# EAGLE board VgaCrystalDiode_SOLVED-production (EAGLE 5.10)
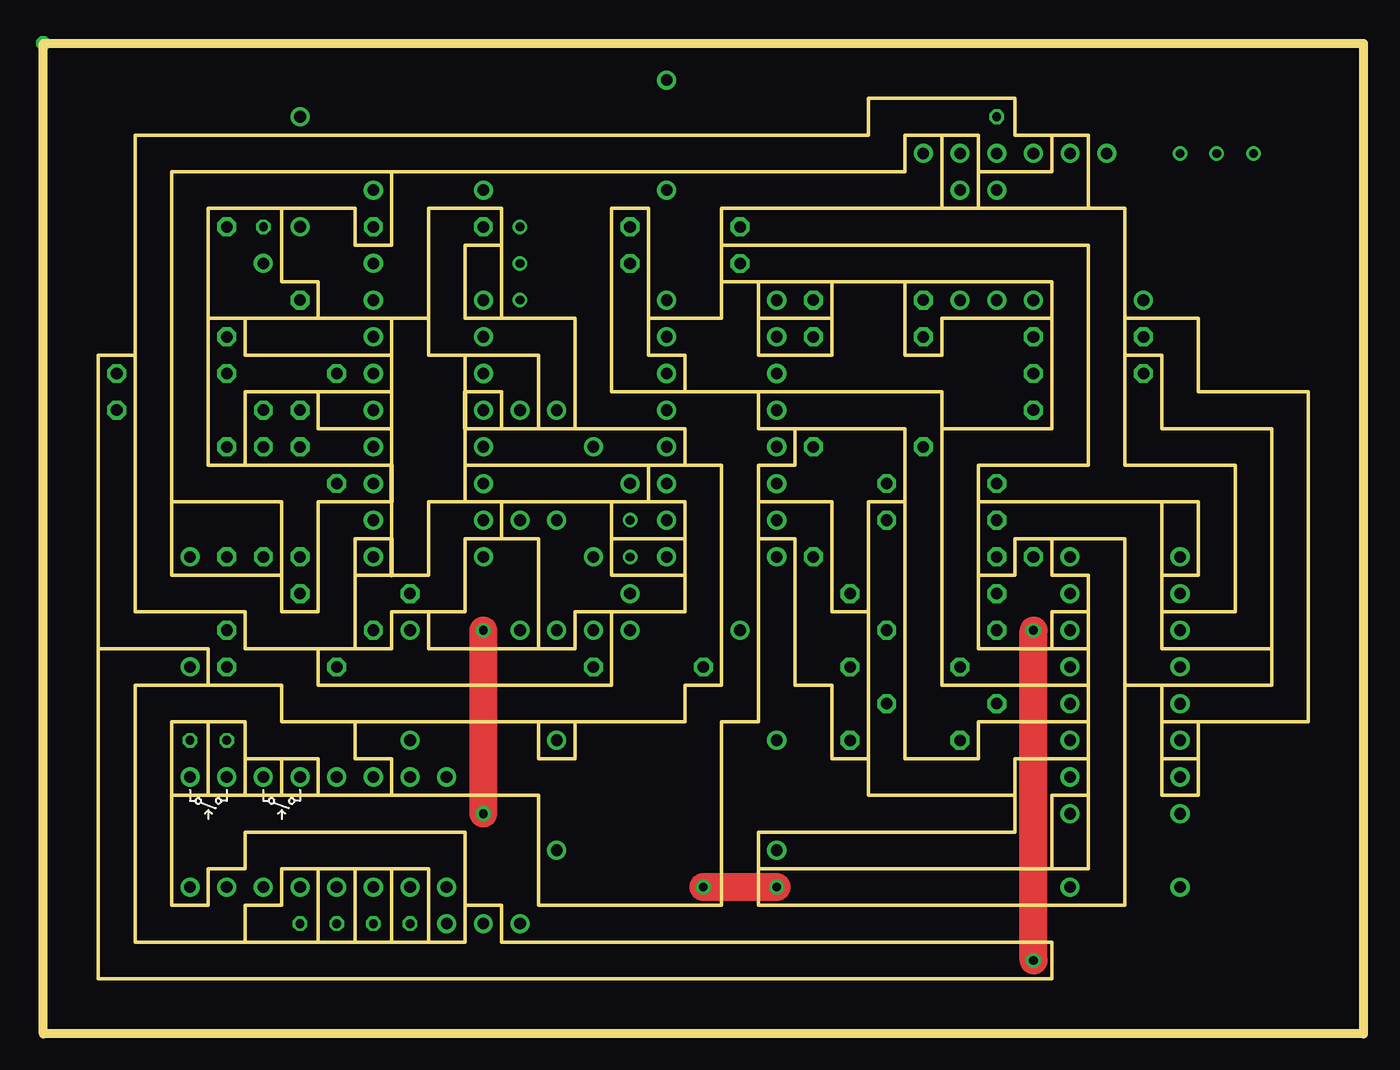
[diagram p0: board, top side]
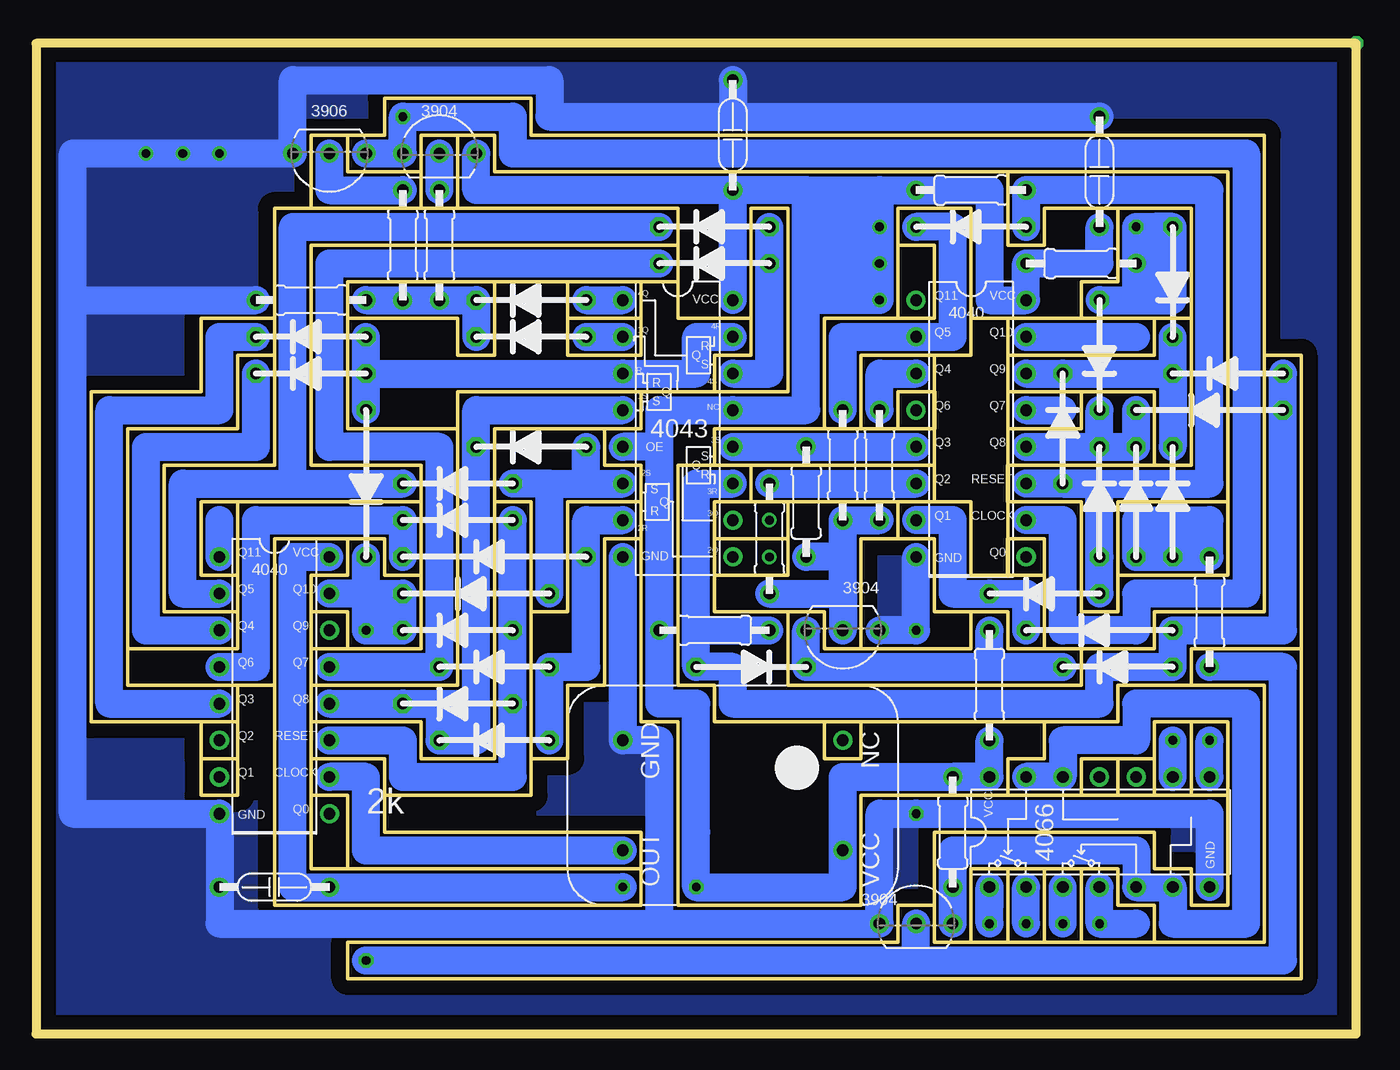
[diagram p1: board, bottom side, seen from below]

Size 91.44 x 68.58 mm. Coordinates in mm from the lower left corner, seen from the top.
Outline: 49.53,36.83 54.61,36.83 54.61,29.21 57.15,29.21
Outline: 49.53,36.83 49.53,39.37 52.07,39.37 52.07,41.91
Outline: 52.07,41.91 49.53,41.91 49.53,44.45
Outline: 49.53,44.45 44.45,44.45
Outline: 44.45,44.45 39.37,44.45 39.37,57.15 41.91,57.15 41.91,49.53
Outline: 41.91,49.53 41.91,46.99 44.45,46.99 44.45,44.45
Outline: 41.91,49.53 46.99,49.53 46.99,52.07
Outline: 46.99,52.07 46.99,54.61
Outline: 46.99,54.61 46.99,57.15 62.23,57.15
Outline: 62.23,57.15 62.23,62.23
Outline: 62.23,62.23 59.69,62.23 59.69,59.69 24.13,59.69
Outline: 24.13,59.69 24.13,54.61 21.59,54.61 21.59,57.15 16.51,57.15
Outline: 16.51,57.15 16.51,52.07 19.05,52.07 19.05,49.53
Outline: 19.05,49.53 24.13,49.53
Outline: 24.13,49.53 26.67,49.53
Outline: 26.67,49.53 26.67,57.15 31.75,57.15 31.75,54.61
Outline: 31.75,54.61 31.75,49.53
Outline: 31.75,49.53 36.83,49.53 36.83,41.91
Outline: 36.83,41.91 44.45,41.91 44.45,39.37
Outline: 44.45,39.37 46.99,39.37 46.99,24.13 44.45,24.13 44.45,21.59 36.83,21.59
Outline: 36.83,21.59 36.83,19.05 34.29,19.05 34.29,21.59
Outline: 34.29,21.59 21.59,21.59
Outline: 21.59,21.59 21.59,19.05 24.13,19.05 24.13,16.51
Outline: 24.13,16.51 34.29,16.51 34.29,8.89 46.99,8.89 46.99,21.59 49.53,21.59 49.53,34.29
Outline: 49.53,34.29 49.53,36.83
Outline: 31.75,34.29 34.29,34.29 34.29,26.67
Outline: 31.75,34.29 29.21,34.29 29.21,29.21 26.67,29.21
Outline: 26.67,29.21 26.67,26.67 34.29,26.67
Outline: 44.45,34.29 44.45,36.83 41.91,36.83
Outline: 44.45,34.29 39.37,34.29
Outline: 39.37,34.29 39.37,36.83
Outline: 39.37,36.83 41.91,36.83
Outline: 44.45,34.29 44.45,31.75
Outline: 44.45,31.75 39.37,31.75 39.37,34.29
Outline: 39.37,36.83 31.75,36.83
Outline: 31.75,36.83 31.75,34.29
Outline: 44.45,31.75 44.45,29.21 39.37,29.21
Outline: 39.37,29.21 39.37,24.13 19.05,24.13 19.05,26.67
Outline: 19.05,26.67 13.97,26.67 13.97,29.21 6.35,29.21 6.35,46.99
Outline: 6.35,46.99 3.81,46.99 3.81,26.67
Outline: 3.81,26.67 11.43,26.67 11.43,24.13
Outline: 11.43,24.13 16.51,24.13 16.51,21.59 21.59,21.59
Outline: 24.13,16.51 19.05,16.51
Outline: 19.05,16.51 19.05,19.05 16.51,19.05
Outline: 16.51,19.05 13.97,19.05
Outline: 13.97,19.05 13.97,21.59 11.43,21.59
Outline: 11.43,21.59 8.89,21.59 8.89,16.51
Outline: 8.89,16.51 8.89,8.89 11.43,8.89 11.43,11.43 13.97,11.43 13.97,13.97 29.21,13.97 29.21,8.89
Outline: 29.21,8.89 29.21,6.35 26.67,6.35
Outline: 26.67,6.35 26.67,11.43 24.13,11.43
Outline: 24.13,11.43 21.59,11.43
Outline: 21.59,11.43 19.05,11.43
Outline: 19.05,11.43 16.51,11.43 16.51,8.89 13.97,8.89 13.97,6.35
Outline: 13.97,6.35 6.35,6.35 6.35,24.13 11.43,24.13
Outline: 3.81,26.67 3.81,3.81 69.85,3.81 69.85,6.35 31.75,6.35 31.75,8.89 29.21,8.89
Outline: 26.67,6.35 24.13,6.35
Outline: 24.13,6.35 24.13,11.43
Outline: 24.13,6.35 21.59,6.35
Outline: 21.59,6.35 21.59,11.43
Outline: 21.59,6.35 19.05,6.35
Outline: 19.05,6.35 19.05,11.43
Outline: 19.05,6.35 13.97,6.35
Outline: 13.97,19.05 13.97,16.51
Outline: 13.97,16.51 11.43,16.51
Outline: 11.43,16.51 8.89,16.51
Outline: 11.43,16.51 11.43,21.59
Outline: 13.97,16.51 16.51,16.51
Outline: 16.51,16.51 19.05,16.51
Outline: 16.51,16.51 16.51,19.05
Outline: 26.67,29.21 24.13,29.21 24.13,26.67 21.59,26.67
Outline: 21.59,26.67 19.05,26.67
Outline: 21.59,26.67 21.59,31.75
Outline: 21.59,31.75 21.59,34.29 24.13,34.29
Outline: 24.13,34.29 24.13,36.83
Outline: 24.13,36.83 19.05,36.83 19.05,29.21 16.51,29.21 16.51,31.75
Outline: 16.51,31.75 8.89,31.75 8.89,36.83
Outline: 8.89,36.83 8.89,59.69 24.13,59.69
Outline: 6.35,46.99 6.35,62.23 57.15,62.23 57.15,64.77 67.31,64.77 67.31,62.23 69.85,62.23
Outline: 69.85,62.23 69.85,59.69 64.77,59.69
Outline: 64.77,59.69 64.77,62.23 62.23,62.23
Outline: 62.23,57.15 64.77,57.15
Outline: 64.77,57.15 64.77,59.69
Outline: 64.77,57.15 72.39,57.15
Outline: 72.39,57.15 72.39,62.23 69.85,62.23
Outline: 49.53,49.53 49.53,46.99 54.61,46.99 54.61,49.53
Outline: 49.53,49.53 54.61,49.53
Outline: 54.61,49.53 54.61,52.07 49.53,52.07 49.53,49.53
Outline: 46.99,52.07 59.69,52.07
Outline: 59.69,52.07 69.85,52.07 69.85,49.53
Outline: 69.85,49.53 69.85,41.91 62.23,41.91
Outline: 62.23,41.91 62.23,24.13 72.39,24.13
Outline: 72.39,24.13 72.39,26.67
Outline: 72.39,26.67 69.85,26.67
Outline: 69.85,26.67 64.77,26.67 64.77,31.75
Outline: 64.77,31.75 64.77,36.83
Outline: 64.77,36.83 64.77,39.37 72.39,39.37 72.39,54.61 46.99,54.61
Outline: 72.39,57.15 74.93,57.15 74.93,49.53
Outline: 74.93,49.53 74.93,46.99
Outline: 74.93,46.99 74.93,39.37 82.55,39.37 82.55,29.21 77.47,29.21
Outline: 77.47,29.21 77.47,31.75
Outline: 77.47,31.75 80.01,31.75 80.01,36.83 77.47,36.83
Outline: 77.47,36.83 64.77,36.83
Outline: 64.77,31.75 67.31,31.75 67.31,34.29 69.85,34.29
Outline: 69.85,34.29 74.93,34.29 74.93,24.13
Outline: 74.93,24.13 77.47,24.13
Outline: 77.47,24.13 85.09,24.13 85.09,26.67
Outline: 85.09,26.67 85.09,41.91 77.47,41.91 77.47,46.99 74.93,46.99
Outline: 77.47,24.13 77.47,21.59
Outline: 77.47,21.59 80.01,21.59
Outline: 80.01,21.59 87.63,21.59 87.63,44.45 80.01,44.45 80.01,49.53 74.93,49.53
Outline: 69.85,49.53 62.23,49.53 62.23,46.99 59.69,46.99 59.69,52.07
Outline: 49.53,44.45 62.23,44.45 62.23,41.91
Outline: 52.07,41.91 59.69,41.91 59.69,36.83
Outline: 59.69,36.83 57.15,36.83 57.15,29.21
Outline: 57.15,19.05 54.61,19.05 54.61,24.13 52.07,24.13 52.07,34.29 49.53,34.29
Outline: 57.15,19.05 57.15,29.21
Outline: 59.69,36.83 59.69,19.05 64.77,19.05 64.77,21.59 72.39,21.59
Outline: 72.39,21.59 72.39,24.13
Outline: 72.39,21.59 72.39,19.05
Outline: 72.39,19.05 67.31,19.05 67.31,16.51
Outline: 67.31,16.51 57.15,16.51 57.15,19.05
Outline: 49.53,11.43 49.53,13.97 67.31,13.97 67.31,16.51
Outline: 72.39,19.05 72.39,16.51
Outline: 72.39,16.51 69.85,16.51 69.85,11.43
Outline: 69.85,11.43 49.53,11.43
Outline: 49.53,11.43 49.53,8.89 74.93,8.89 74.93,24.13
Outline: 69.85,11.43 72.39,11.43 72.39,16.51
Outline: 77.47,21.59 77.47,19.05
Outline: 77.47,19.05 80.01,19.05
Outline: 80.01,19.05 80.01,21.59
Outline: 80.01,19.05 80.01,16.51 77.47,16.51 77.47,19.05
Outline: 77.47,29.21 77.47,26.67 85.09,26.67
Outline: 77.47,31.75 77.47,36.83
Outline: 34.29,26.67 36.83,26.67 36.83,29.21 39.37,29.21
Outline: 19.05,49.53 13.97,49.53
Outline: 13.97,49.53 11.43,49.53
Outline: 11.43,49.53 11.43,57.15 16.51,57.15
Outline: 11.43,49.53 11.43,39.37 13.97,39.37
Outline: 13.97,39.37 13.97,44.45 19.05,44.45
Outline: 19.05,44.45 24.13,44.45
Outline: 24.13,44.45 24.13,46.99
Outline: 24.13,46.99 13.97,46.99 13.97,49.53
Outline: 24.13,46.99 24.13,49.53
Outline: 24.13,44.45 24.13,41.91
Outline: 24.13,41.91 19.05,41.91 19.05,44.45
Outline: 13.97,39.37 24.13,39.37
Outline: 24.13,39.37 24.13,41.91
Outline: 31.75,54.61 29.21,54.61 29.21,49.53 31.75,49.53
Outline: 36.83,41.91 34.29,41.91
Outline: 34.29,41.91 34.29,46.99 29.21,46.99
Outline: 29.21,46.99 26.67,46.99 26.67,49.53
Outline: 34.29,41.91 31.75,41.91
Outline: 31.75,41.91 31.75,44.45 29.21,44.45
Outline: 29.21,44.45 29.21,46.99
Outline: 44.45,39.37 41.91,39.37
Outline: 41.91,39.37 29.21,39.37
Outline: 29.21,39.37 29.21,41.91
Outline: 29.21,41.91 31.75,41.91
Outline: 29.21,39.37 29.21,36.83
Outline: 29.21,36.83 31.75,36.83
Outline: 41.91,36.83 41.91,39.37
Outline: 21.59,31.75 24.13,31.75
Outline: 24.13,31.75 26.67,31.75 26.67,36.83 29.21,36.83
Outline: 8.89,36.83 16.51,36.83 16.51,31.75
Outline: 72.39,26.67 72.39,29.21
Outline: 72.39,29.21 72.39,31.75 69.85,31.75 69.85,34.29
Outline: 69.85,26.67 69.85,29.21 72.39,29.21
Outline: 34.29,21.59 36.83,21.59
Outline: 24.13,36.83 24.13,39.37
Outline: 24.13,34.29 24.13,31.75
Outline: 29.21,41.91 29.21,44.45
Outline: 0,0 0,68.58 91.44,68.58 91.44,0 0,0
Copper layers (1*16): Top 0.035mm / dielectric 1.5mm / Bottom 0.035mm
Design rules "default": minimum track width 10mil, minimum drill 24mil, track to track 8mil, track to pad 8mil, pad to pad 8mil, via to via 8mil, smd to smd 8mil, copper to edge 40mil, drill to drill 8mil, minimum pad ring 10mil, minimum via ring 8mil, stop-mask expansion 4mil, vias tented up to drill 0mil, thermal gap 10mil

## Footprints (pad centres in the part's own frame; a part is rotated, then mirrored left to right if it is on the bottom)
4043-SR-LATCH = drill 0.813 round: 1!R -3.81,1.27; 1!S -3.81,3.81; 1Q 3.81,1.27; 2!R -3.81,-3.81; 2!S -3.81,-6.35; 2Q 3.81,-8.89; 3!R 3.81,-1.27; 3!S 3.81,-3.81; 3Q 3.81,-6.35; 4!R 3.81,3.81; 4!S 3.81,6.35; 4Q -3.81,8.89; GND -3.81,-8.89; NC -3.81,6.35; OE -3.81,-1.27; VCC 3.81,8.89
DIODE = drill 0.8 octagon: P$1 -3.81,0; P$2 3.81,0
DIODE-L2 = drill 0.8 octagon: P$1 -5.08,0; P$2 5.08,0
404-BIN-COUNT = drill 0.813 round: CLOCK 3.81,-7.62; GND -3.81,-10.16; Q0 3.81,-10.16; Q1 -3.81,-7.62; Q2 -3.81,-5.08; Q3 -3.81,-2.54; Q4 -3.81,2.54; Q5 -3.81,5.08; Q6 -3.81,0; Q7 3.81,0; Q8 3.81,-2.54; Q9 3.81,2.54; Q10 3.81,5.08; Q11 -3.81,7.62; RESET 3.81,-5.08; VCC 3.81,7.62
711A-XTAL = drill 0.813 round: GND -3.81,-8.89; NC -3.81,6.35; OUT 3.81,-8.89; VCC 3.81,6.35
4066-QUAD-SW = drill 0.813 round: A1 -3.81,7.62; A2 -3.81,2.54; A3 3.81,-5.08; A4 3.81,0; B1 -3.81,5.08; B2 -3.81,0; B3 3.81,-7.62; B4 3.81,-2.54; C1 3.81,5.08; C2 -3.81,-2.54; C3 -3.81,-5.08; C4 3.81,2.54; GND -3.81,-7.62; VCC 3.81,7.62
RESISTOR = drill 0.813 round: IN1 -3.81,0; IN2 3.81,0
TRANSISTOR = drill 0.8 round: P$1 0,0; P$2 2.54,0; P$3 -2.54,0
CAPACITOR = drill 0.813 round: IN1 -2.54,0; IN2 5.08,0
DIODE-L3 = drill 0.8 octagon: P$1 -6.35,0; P$2 6.35,0

## Placement (x,y rotation side)
E$1  [4043-SR-LATCH]  46.99,41.91 0 bottom
E$2  [DIODE]  44.45,53.34 180 bottom
E$3  [DIODE]  62.23,22.86 180 bottom
E$4  [DIODE-L2]  10.16,43.18 180 bottom
E$5  [404-BIN-COUNT]  74.93,25.4 0 bottom
E$6  [711A-XTAL]  41.91,16.51 270 bottom
E$7  [4066-QUAD-SW]  17.78,13.97 90 bottom
E$8  [DIODE]  12.7,36.83 90 bottom
E$9  [DIODE]  62.23,27.94 180 bottom
E$10  2K  [RESISTOR]  10.16,29.21 270 bottom
E$11  [DIODE]  62.23,35.56 180 bottom
E$12  [DIODE]  59.69,20.32 180 bottom
E$13  [DIODE]  59.69,25.4 180 bottom
E$14  [DIODE]  57.15,48.26 180 bottom
E$15  [DIODE]  44.45,55.88 180 bottom
E$16  [TRANSISTOR]  30.48,7.62 0 bottom
E$17  [DIODE-L2]  68.58,38.1 270 bottom
E$18  [DIODE]  62.23,38.1 180 bottom
E$19  [DIODE]  57.15,40.64 180 bottom
E$20  2K  [RESISTOR]  26.67,58.42 0 bottom
E$21  [DIODE-L2]  60.96,30.48 180 bottom
E$22  [DIODE]  57.15,50.8 180 bottom
E$23  10K  [RESISTOR]  44.45,27.94 0 bottom
E$24  1UF  [CAPACITOR]  43.18,60.96 90 bottom
E$25  [DIODE]  72.39,45.72 180 bottom
E$26  [DIODE]  72.39,48.26 180 bottom
E$27  [404-BIN-COUNT]  26.67,43.18 0 bottom
E$28  [DIODE]  17.78,36.83 90 bottom
E$29  [DIODE]  20.32,41.91 90 bottom
E$30  [DIODE]  21.59,30.48 180 bottom
E$31  [DIODE]  26.67,55.88 180 bottom
E$33  [DIODE]  17.78,46.99 270 bottom
E$34  [DIODE]  12.7,52.07 270 bottom
E$35  2K  [RESISTOR]  66.04,54.61 90 bottom
E$36  2K  [RESISTOR]  63.5,54.61 90 bottom
E$37  [DIODE-L3]  59.69,33.02 180 bottom
E$38  [TRANSISTOR]  71.12,60.96 180 bottom
E$39  10K  [RESISTOR]  72.39,50.8 180 bottom
E$40  [DIODE]  15.24,36.83 90 bottom
E$41  2K  [RESISTOR]  19.05,53.34 180 bottom
E$42  2K  [RESISTOR]  27.94,13.97 270 bottom
E$43  2K  [RESISTOR]  25.4,24.13 270 bottom
E$44  1UF  [CAPACITOR]  17.78,58.42 90 bottom
E$45  1UF  [CAPACITOR]  76.2,10.16 0 bottom
E$46  [DIODE]  16.51,25.4 180 bottom
E$47  [DIODE]  8.89,45.72 180 bottom
E$48  [TRANSISTOR]  63.5,60.96 0 bottom
E$50  [DIODE-L2]  17.78,27.94 180 bottom
E$51  [TRANSISTOR]  35.56,27.94 180 bottom
E$52  2K  [RESISTOR]  33.02,39.37 270 bottom
E$54  2K  [RESISTOR]  35.56,39.37 270 bottom
E$56  [DIODE]  41.91,25.4 0 bottom
E$57  2K  [RESISTOR]  38.1,36.83 270 bottom
E$58  2K  [RESISTOR]  40.64,34.29 270 bottom

## Library data of the parts
E$1-E$31 E$33-E$48 E$50-E$52 E$54 E$56-E$58 = RussellLibrary

## Nets
GND: E$1.GND E$5.GND E$6.GND E$7.GND E$16.P$3 E$24.IN2 E$27.GND E$39.IN2 E$44.IN2 E$51.P$3
S$1: E$5.CLOCK E$6.OUT
S$2: E$5.Q11
S$3: E$3.P$1 E$5.RESET E$11.P$1
S$4: E$1.1!R E$3.P$2 E$5.Q8 E$12.P$2
S$5: E$8.P$1 E$10.IN1 E$40.P$1
S$6: E$5.Q5 E$15.P$2 E$18.P$2
S$7: E$1.1Q E$1.OE E$5.VCC E$6.VCC E$7.VCC E$27.VCC E$41.IN2 E$43.IN2 E$44.IN1
S$8: E$1.2!S E$12.P$1 E$13.P$1
S$9: E$1.2!R E$18.P$1 E$19.P$1
S$10: E$5.Q4 E$25.P$2
S$11: E$1.1!S E$1.4!S E$26.P$1
S$12: E$1.4!R E$2.P$1 E$15.P$1
S$13: E$2.P$2 E$5.Q7 E$13.P$2
S$14: E$1.4Q E$22.P$1
S$15: E$1.NC E$14.P$1
S$16: E$27.CLOCK
S$17: E$5.Q3 E$26.P$2
S$18: E$1.3!S E$23.IN2
S$19: E$27.Q4 E$52.IN1
S$20: E$8.P$2 E$27.Q9 E$29.P$2 E$34.P$2
S$21: E$27.Q8 E$28.P$2 E$33.P$2 E$40.P$2
S$22: E$1.3!R
S$23: E$20.IN2 E$27.RESET E$28.P$1 E$29.P$1 E$30.P$1 E$31.P$1
S$24: E$35.IN2
S$26: E$14.P$2 E$22.P$2 E$35.IN1 E$36.IN1 E$39.IN1
S$27: E$36.IN2
S$28: E$27.Q2 E$58.IN1
S$29: E$27.Q1 E$30.P$2 E$50.P$2
S$30: E$27.Q5 E$31.P$2 E$54.IN1
S$31: E$27.Q10
S$32: E$5.Q10 E$10.IN2 E$16.P$1 E$21.P$2
S$33: E$7.C1 E$7.C2 E$7.C3 E$7.C4 E$16.P$2
S$34: E$27.Q7
S$35: E$33.P$1 E$34.P$1 E$41.IN1
S$36: E$1.VCC
S$37: E$43.IN1 E$46.P$2 E$51.P$2
S$38: E$51.P$1 E$52.IN2 E$54.IN2 E$57.IN2 E$58.IN2
S$40: E$7.A1
S$43: E$7.A3
S$44: E$7.B3
S$45: E$7.B1
S$46: E$7.A2
S$47: E$7.B2
S$52: E$5.Q6 E$11.P$2

## Tracks (layer width: path | path; a pad name or v marks a point on that pad's centre or on a via)
GND  (via drill 0.6)
  Top 1.93: v30.48,15.24 v30.48,27.94
  Bottom 1.93: E$27.GND v30.48,27.94 E$51.P$3 | E$7.GND 10.16,15.24 v30.48,15.24 33.02,15.24 E$16.P$3 48.26,7.62 | 43.18,63.5 55.88,63.5 55.88,66.04 73.66,66.04 73.66,60.96 v78.74,60.96 v81.28,60.96 v83.82,60.96 88.9,60.96 88.9,50.8 | 43.18,63.5 E$44.IN2 | E$1.GND E$6.GND 48.26,20.32 48.26,7.62 | 48.26,7.62 78.74,7.62 E$5.GND 88.9,15.24 88.9,50.8 | 88.9,50.8 E$39.IN2 | E$24.IN2 43.18,63.5
  pour Bottom: 90.17,1.27 90.17,68.58 0,68.58 0,1.27
S$1
  Bottom 1.93: E$5.CLOCK 68.58,17.78 68.58,12.7 E$6.OUT
S$2
  Bottom 1.93: E$5.Q11 78.74,35.56
S$3
  Bottom 1.93: E$5.RESET 66.04,20.32 66.04,17.78 58.42,17.78 E$3.P$1 E$11.P$1
S$4
  Bottom 1.93: 60.96,21.59 62.23,21.59 | 60.96,21.59 60.96,20.32 E$12.P$2 63.5,22.86 E$3.P$2 | 60.96,22.86 60.96,43.18 E$1.1!R | 60.96,22.86 60.96,21.59 | E$3.P$2 60.96,22.86 | E$5.Q8 E$3.P$2
S$5
  Bottom 1.93: 11.43,33.02 E$8.P$1 E$40.P$1 15.24,34.29 | 11.43,33.02 E$10.IN1 10.16,35.56 15.24,35.56 15.24,34.29 | 15.24,34.29 11.43,34.29 11.43,33.02
S$6
  Bottom 1.93: 73.66,38.1 81.28,38.1 81.28,30.48 E$5.Q5 | 73.66,38.1 E$18.P$2 | 73.66,38.1 73.66,55.88 E$15.P$2
S$7  (via drill 0.6)
  Top 1.93: v50.8,10.16 v45.72,10.16
  Bottom 1.93: E$44.IN1 17.78,53.34 E$41.IN2 E$27.VCC 25.4,50.8 25.4,58.42 33.02,58.42 | 60.96,60.96 60.96,58.42 38.1,58.42 | 38.1,58.42 33.02,58.42 | E$7.VCC 27.94,17.78 | E$7.VCC E$43.IN2 | 48.26,40.64 48.26,43.18 E$1.1Q 38.1,43.18 38.1,50.8 | 48.26,40.64 E$1.OE | E$7.VCC 35.56,17.78 E$6.VCC 35.56,10.16 v45.72,10.16 | 48.26,40.64 48.26,22.86 45.72,22.86 v45.72,10.16 | v45.72,10.16 45.72,13.97 | E$5.VCC 73.66,33.02 73.66,10.16 v50.8,10.16 | 38.1,52.07 38.1,58.42 | 33.02,58.42 33.02,50.8 38.1,50.8 | 38.1,50.8 38.1,52.07 | 38.1,52.07 34.29,52.07 34.29,57.15 36.83,57.15 36.83,53.34 35.56,53.34 35.56,55.88
S$8
  Bottom 1.93: E$1.2!S 53.34,35.56 53.34,25.4 E$13.P$1 E$12.P$1
S$9
  Bottom 1.93: 55.88,38.1 53.34,38.1 | 53.34,38.1 E$1.2!R | 55.88,38.1 E$18.P$1 | 55.88,30.48 55.88,38.1 | 53.34,38.1 E$19.P$1
S$10
  Bottom 1.93: E$5.Q4 83.82,27.94 83.82,40.64 76.2,40.64 E$25.P$2
S$11
  Bottom 1.93: 68.58,45.72 E$1.1!S 45.72,45.72 45.72,48.26 E$1.4!S | 68.58,45.72 E$26.P$1 | 68.58,43.18 68.58,45.72
S$12
  Bottom 1.93: E$1.4!R 40.64,45.72 E$2.P$1 E$15.P$1
S$13
  Bottom 1.93: E$5.Q7 E$13.P$2 63.5,40.64 71.12,40.64 71.12,53.34 E$2.P$2
S$14
  Bottom 1.93: E$22.P$1 E$1.4Q
S$15
  Bottom 1.93: E$14.P$1 E$1.NC
S$16  (via drill 0.6)
  Bottom 1.93: 68.58,60.96 66.04,60.96 v66.04,63.5 58.42,63.5 58.42,60.96 7.62,60.96 7.62,30.48 15.24,30.48 15.24,27.94 20.32,27.94 20.32,35.56 E$27.CLOCK
S$17
  Bottom 1.93: E$26.P$2 78.74,48.26 78.74,43.18 86.36,43.18 86.36,22.86 E$5.Q3
S$18
  Bottom 1.93: 5.08,45.72 5.08,27.94 12.7,27.94 12.7,25.4 17.78,25.4 17.78,22.86 43.18,22.86 43.18,25.4 45.72,25.4 45.72,27.94 | 45.72,27.94 45.72,38.1 E$1.3!S | 45.72,27.94 E$23.IN2
S$19
  Bottom 1.93: E$52.IN1 33.02,45.72 E$27.Q4
S$20
  Bottom 1.93: 12.7,45.72 E$8.P$2 | 12.7,45.72 E$34.P$2 | 12.7,45.72 E$29.P$2 E$27.Q9
S$21
  Bottom 1.93: E$27.Q8 E$28.P$2 | 15.24,43.18 E$40.P$2 E$28.P$2 | E$28.P$2 E$33.P$2
S$22
  Bottom 1.93: E$1.3!R 30.48,40.64
S$23
  Bottom 1.93: E$29.P$1 10.16,38.1 10.16,58.42 E$20.IN2 E$31.P$1 | E$29.P$1 17.78,38.1 E$28.P$1 E$30.P$1 | E$29.P$1 E$27.RESET
S$24
  Bottom 1.93: E$35.IN2 71.12,58.42 71.12,60.96
S$25  (via drill 0.6)
  other vias: 0,68.58
S$26
  Bottom 1.93: E$14.P$2 E$22.P$2 E$36.IN1 E$35.IN1 E$39.IN1
S$27
  Bottom 1.93: E$36.IN2 63.5,60.96
S$28
  Bottom 1.93: E$58.IN1 E$27.Q2
S$29
  Bottom 1.93: E$50.P$2 22.86,30.48 E$30.P$2 27.94,30.48 27.94,35.56 E$27.Q1
S$30
  Bottom 1.93: E$31.P$2 27.94,55.88 27.94,48.26 E$27.Q5 35.56,48.26 E$54.IN1
S$31
  Bottom 1.93: E$27.Q10 15.24,48.26
S$32  (via drill 0.6)
  Top 1.93: v68.58,5.08 v68.58,27.94
  Bottom 1.93: E$10.IN2 5.08,25.4 5.08,5.08 30.48,5.08 | 68.58,30.48 E$5.Q10 | v68.58,27.94 68.58,30.48 | v68.58,5.08 30.48,5.08 | 30.48,5.08 E$16.P$1 | v68.58,27.94 67.31,27.94 67.31,29.21 | v68.58,27.94 66.04,27.94 E$21.P$2 68.58,30.48 | 68.58,30.48 68.58,33.02
S$33
  Bottom 1.93: E$16.P$2 27.94,12.7 15.24,12.7 E$7.C2 E$7.C3 12.7,7.62 7.62,7.62 7.62,22.86 15.24,22.86 15.24,20.32 20.32,20.32 E$7.C4 E$7.C1
S$34
  Bottom 1.93: E$27.Q7 20.32,43.18
S$35  (via drill 0.6)
  Bottom 1.93: E$33.P$1 15.24,50.8 | 15.24,50.8 E$41.IN1 v15.24,55.88 13.97,55.88 | 15.24,50.8 12.7,50.8 E$34.P$1 13.97,55.88 | 13.97,55.88 13.97,52.07
S$36
  Bottom 1.93: E$1.VCC 43.18,58.42
S$37
  Bottom 1.93: 25.4,25.4 38.1,25.4 E$51.P$2 | 25.4,25.4 E$43.IN1 | 25.4,25.4 E$46.P$2
S$38
  Bottom 1.93: E$52.IN2 E$54.IN2 35.56,33.02 | 35.56,30.48 35.56,33.02 | 35.56,30.48 E$51.P$1 | E$58.IN2 35.56,30.48 | 35.56,33.02 E$57.IN2
S$39  (via drill 0.6)
  other vias: 40.64,35.56
S$40  (via drill 0.6)
  Bottom 1.93: v25.4,7.62 E$7.A1 25.4,8.89
S$41  (via drill 0.6)
  other vias: 33.02,55.88
S$42  (via drill 0.6)
  other vias: 33.02,53.34
S$43  (via drill 0.6)
  Bottom 1.93: E$7.A3 v12.7,20.32
S$44  (via drill 0.6)
  Bottom 1.93: E$7.B3 v10.16,20.32
S$45  (via drill 0.6)
  Bottom 1.93: v22.86,7.62 E$7.B1
S$46  (via drill 0.6)
  Bottom 1.93: v20.32,7.62 E$7.A2
S$47  (via drill 0.6)
  Bottom 1.93: v17.78,7.62 E$7.B2
S$48
  Bottom 1.93: 17.78,7.62 15.24,7.62
S$49  (via drill 0.6)
  other vias: 33.02,50.8
S$50  (via drill 0.6)
  other vias: 40.64,33.02
S$52
  Bottom 1.93: 66.04,33.02 E$11.P$2 76.2,35.56 76.2,25.4 E$5.Q6

## Text on the board
Unrouted: HSYNC | VST | PROBLEM | GOOD | x
bPlace: 3904 | 3906 | 3904 | 2k | 3904